# Altium PCB LM386AMPLIFIER.PcbDoc
Units mm, origin at the board's own origin, x right, y up, seen from the top; angles counter-clockwise.
Board outline 38 x 34 mm, 2 copper layers (Top Layer, Bottom Layer); 20 components, 13 nets, 45 pads, 0 vias.
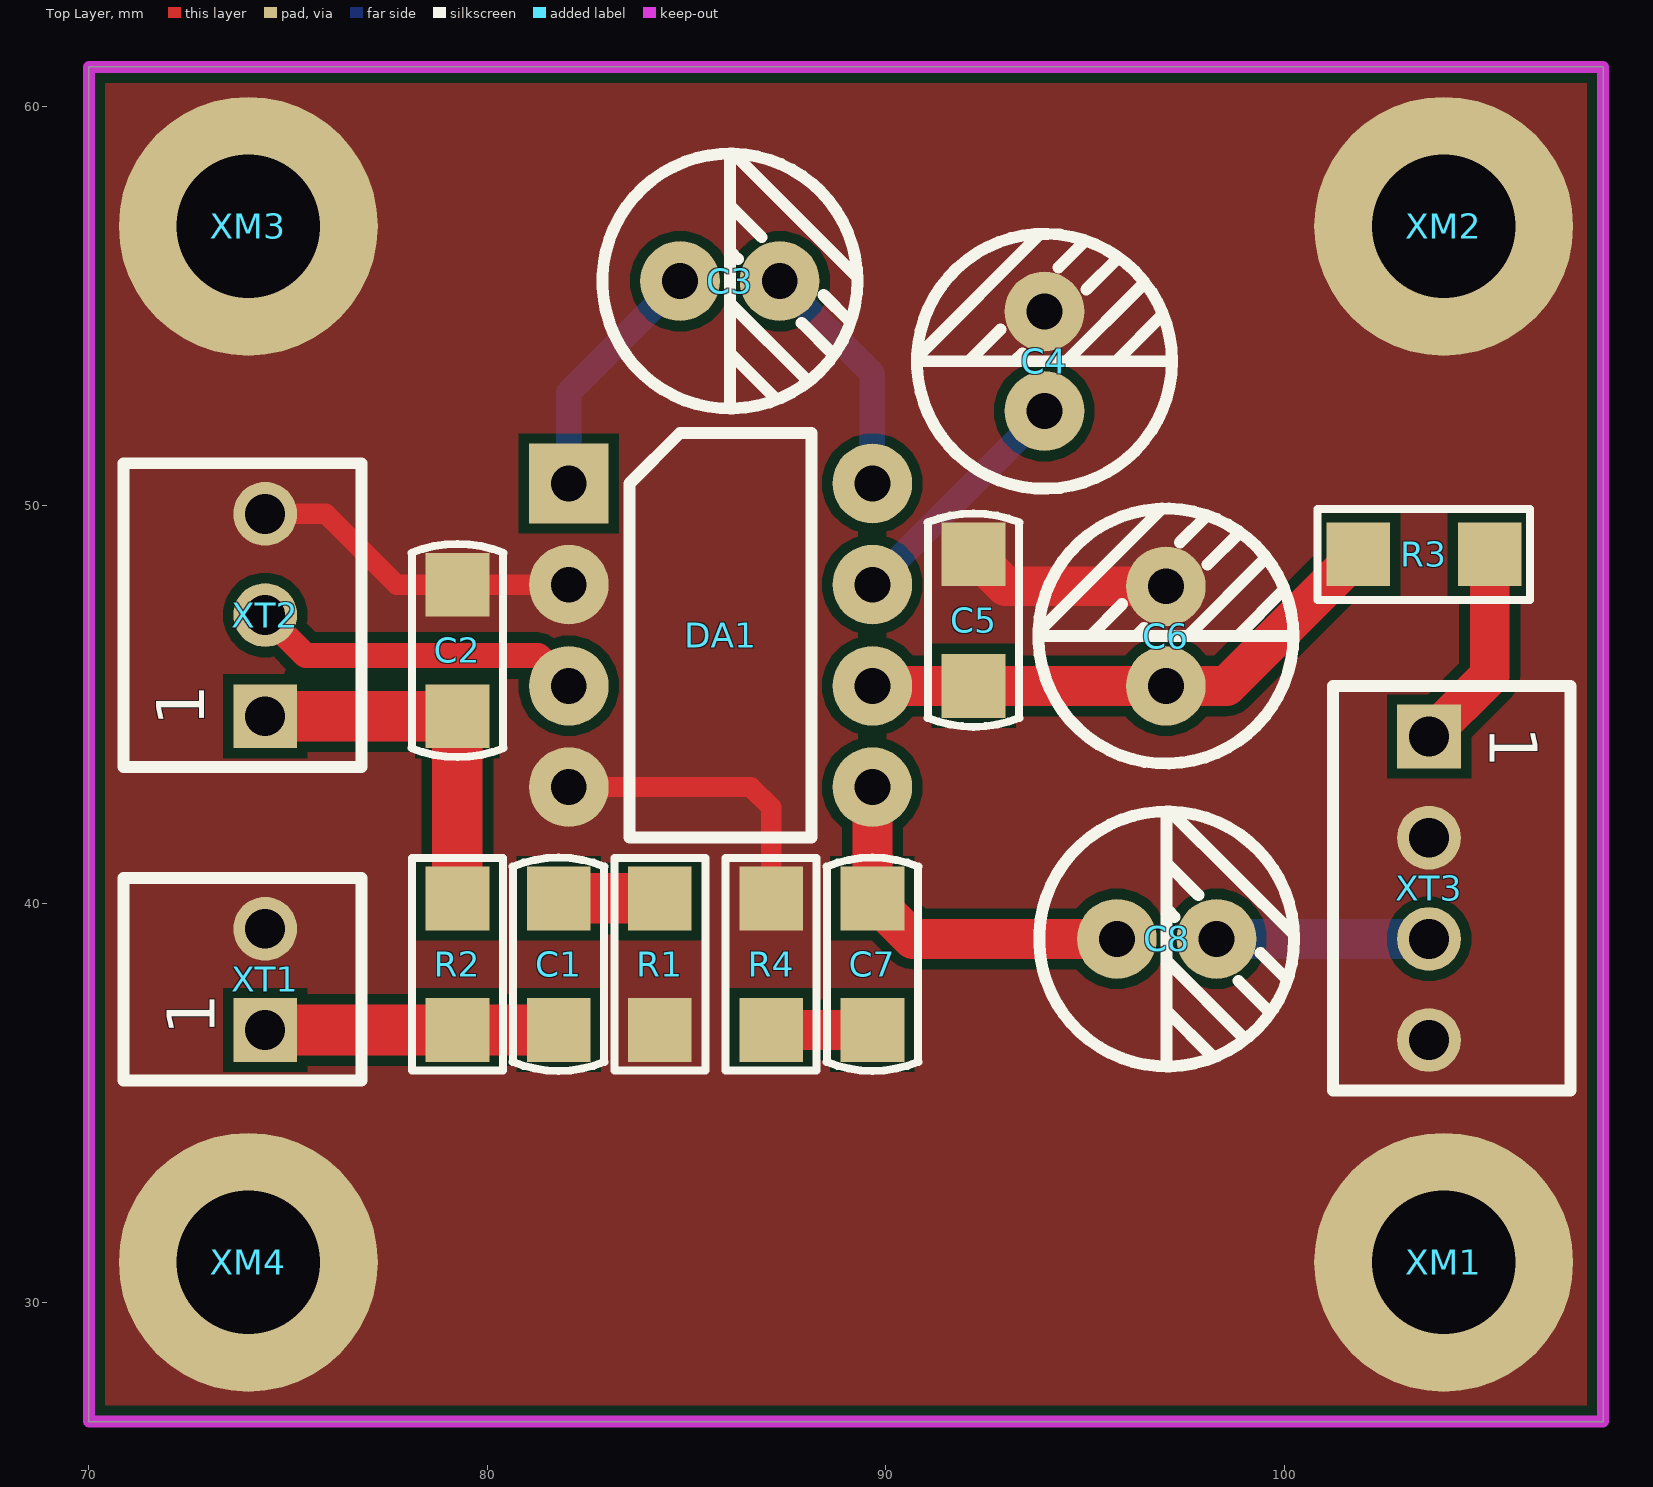
[diagram p0: Top Layer view]
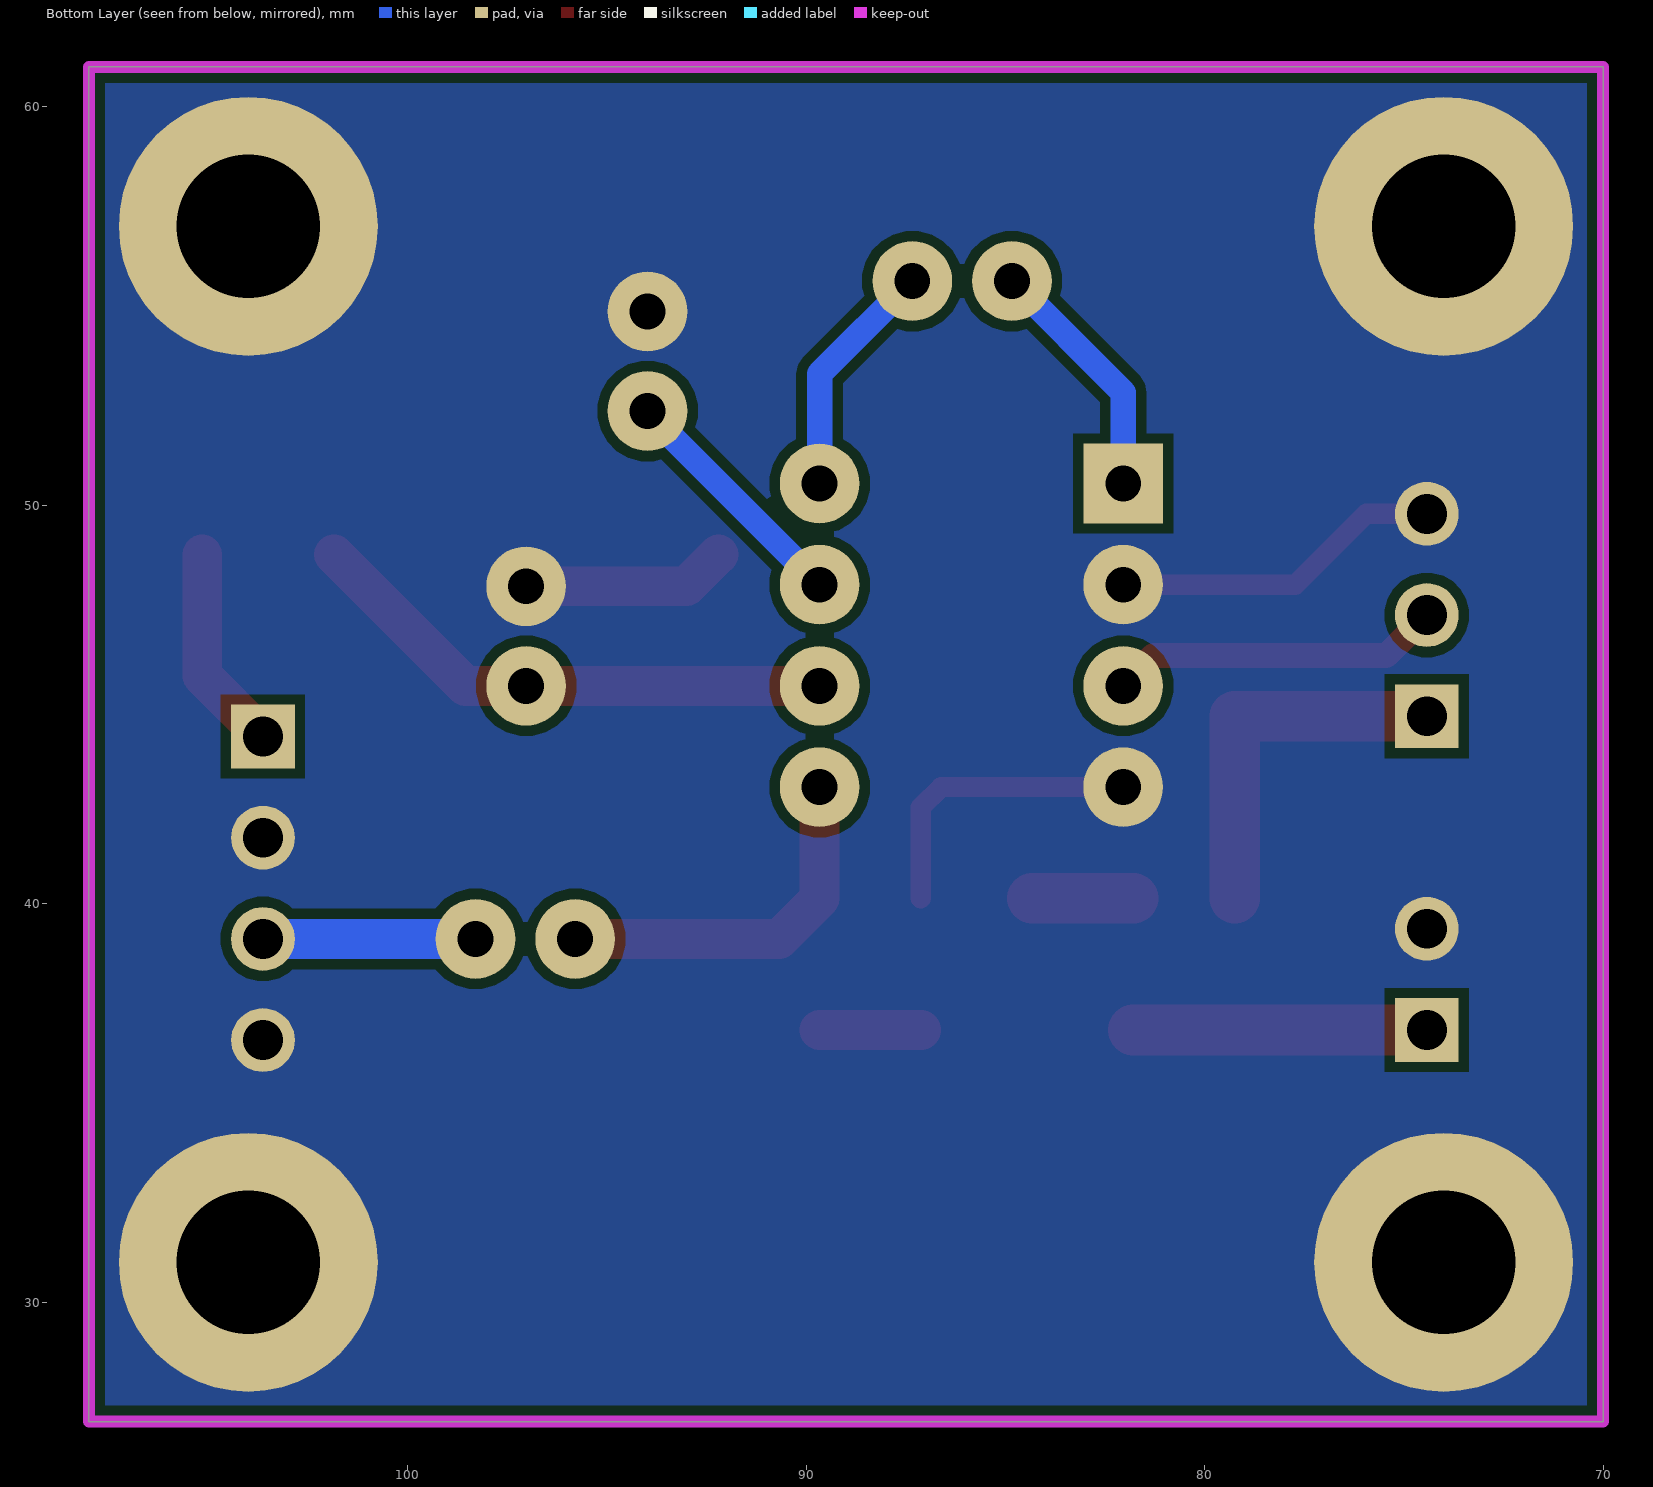
[diagram p1: Bottom Layer view, seen from below]
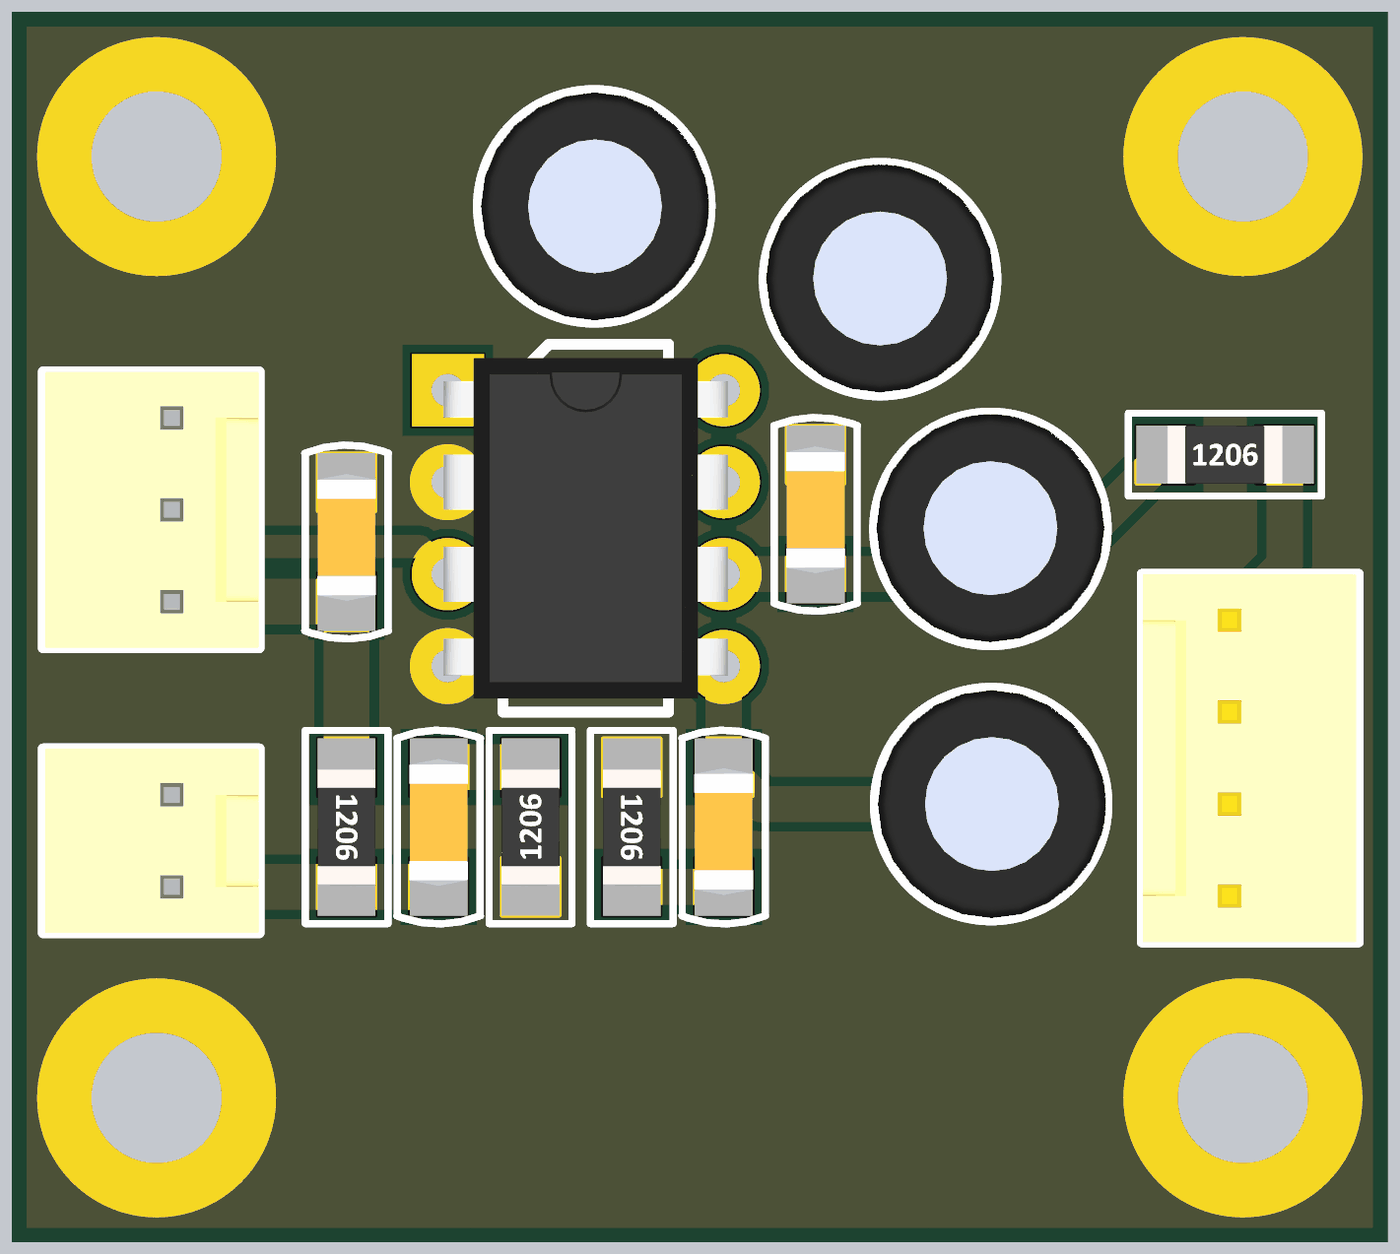
[diagram p2: 3D render of the assembled board from above, using the file's embedded part models]

## Layer stack, top to bottom
Top Solder: solder mask 0.0102, Solder Resist, Dk 3.5
Top Layer: signal copper 0.0356
Dielectric 1: dielectric 0.32, FR-4, Dk 4.8
Bottom Layer: signal copper 0.0356
Bottom Solder: solder mask 0.0102, Solder Resist, Dk 3.5

## Board outline
70,27 108,27 108,61 70,61

## Design rules (kind name [scope] priority, off if disabled: settings)
Clearance [All] p1: gap=0.254 ignorepadtopadclearanceinfootprint=FALSE except(0: Arc-Hole Track-Hole SMDPad-Hole THPad-Hole Via-Hole Fill-Hole Poly-Hole Region-Hole Text-Hole)
HoleSize [All] p1: absolutevalues=TRUE maxlimit=4 minlimit=0.3 maxpercent=80.000 minpercent=20.000
MinimumSolderMaskSliver [All] p1: minsoldermaskwidth=0.05
PlaneConnect [All] p1: planeconnectstyle=Direct reliefexpansion=0.508 reliefentries=4 reliefconductorwidth=0.254 reliefairgap=0.254
PolygonConnect [All] p1: connectstyle=Direct reliefconductorwidth=0.254 reliefentries=4 polygonreliefangle="90 Angle" airgapwidth=0.254
RoomDefinition LM386AMPLIFIER [InComponentClass('LM386AMPLIFIER')] p1: confinementstyle=ConfineIn formatcopy=TRUE lockcomponents=FALSE outline 70,27 108,27 108,61 70,61
RoutingVias [All] p1: holewidth=0.711 width=1.27 viastyle="Through Hole" minholewidth=0.711 minwidth=1.27 maxholewidth=0.711 maxwidth=1.27
SilkToSilkClearance [All] p1: silktosilkclearance=0
SilkToSolderMaskClearance [IsPad] p1: minsilkscreentomaskgap=0.05 clearancetoexposedcopper=TRUE
SolderMaskExpansion [All] p1: expansion=0.05 istentingtop=FALSE
Width [All] p1: maxlimit=1.27 minlimit=0.254 preferedwidth=0.254
25 further rules are at their usual default settings.

## Components (designator, comment, footprint, x,y, rotation, side; value= is the part's Value field where it differs from the comment)
C1 "10nF" C1206M 81.788,36.83 r90 top
C2 "47nF" C1206M 79.248,44.704 r90 top
C3 "10uF 16V" D6.3_P2.5 84.836,55.626 r90 top
C4 "10uF 16V" D6.3_P2.5 93.98,52.364 r180 top
C5 "100nF" C1206M 92.202,45.466 r90 top
C6 "220uF 16V" D6.3_P2.5 97.028,45.466 r180 top
C7 "10nF" C1206M 89.662,40.132 r270 top
C8 "220uF 16V" D6.3_P2.5 95.798,39.116 r90 top
DA1 "LM386N-1" DIP8 82.042,50.546 r0 top
R1 "51R" R1206M 84.328,36.83 r90 top
R2 "1k2" R1206M 79.248,40.132 r270 top
R3 "22R" R1206M 101.854,48.768 r0 top
R4 "51R" R1206M 87.122,40.132 r270 top
XM1 "" XM_D6.5mm_d3.6mm 104,31 r0 top
XM2 "" XM_D6.5mm_d3.6mm 104,57 r0 top
XM3 "" XM_D6.5mm_d3.6mm 74,57 r0 top
XM4 "" XM_D6.5mm_d3.6mm 74,31 r0 top
XT1 "X2" WF2 74.422,38.1 r90 top
XT2 "X3" WF3 74.422,47.244 r90 top
XT3 "X4" WF4 103.632,40.386 r270 top

## Footprints (in the part's own frame and the unit in brackets; to place one, negate y for a bottom-side part, rotate by r counter-clockwise, add the part's x,y. Pads: shape width x height; smd on the part's side, far side on the other; paste and mask are expansions set on the pad)
C1206M [mm]
  rect 1.6x1.6 smd: 1(0,0) 2(3.302,0)
  silkscreen extent -1.03,-1.16 4.33,1.16, body extent 0.03,-0.81 3.53,0.81, height 1.61
D6.3_P2.5 [mm]
  round 2 hole 0.9: 1(0,0) 2(0,-2.5)
  silkscreen extent -3.2,-4.45 3.2,1.95, body extent -3.15,-4.42 3.15,1.88, height 11
DIP8 [mm]
  rect 2x2 hole 0.9: 1(0,0)
  round 2 hole 0.9: 2(0,-2.54) 3(0,-5.08) 4(0,-7.62) 5(7.62,-7.62) 6(7.62,-5.08) 7(7.62,-2.54) 8(7.62,0)
  silkscreen extent 1.52,-8.89 6.1,1.27, body extent -0.13,-8.51 7.75,0.89, height 4.36
R1206M [mm]
  rect 1.6x1.6 smd: 1(0,0) 2(3.302,0)
  silkscreen extent -1.02,-1.14 4.32,1.14, body extent 0.05,-0.8 3.25,0.8, height 0.47
WF2 [mm]
  rect 1.6x1.6 hole 1: 1(-1.27,0)
  round 1.6 hole 1: 2(1.27,0)
  silkscreen extent -2.54,-2.41 2.54,3.56, body extent -2.54,-2.4 2.54,3.5, height 11.4
WF3 [mm]
  rect 1.6x1.6 hole 1: 1(-2.54,0)
  round 1.6 hole 1: 2(0,0) 3(2.54,0)
  silkscreen extent -3.81,-2.41 3.81,3.56, body extent -3.81,-2.4 3.81,3.5, height 11.4
WF4 [mm]
  rect 1.6x1.6 hole 1: 1(-3.81,0)
  round 1.6 hole 1: 2(-1.27,0) 3(1.27,0) 4(3.81,0)
  silkscreen extent -5.08,-2.41 5.08,3.56, body extent -5.08,-2.4 5.08,3.5, height 11.4
XM_D6.5mm_d3.6mm [mm]
  round 6.5 hole 3.6: 1(0,0)

## Part data
C1 C2 C5 C7: library part CAP
C3 C4 C6 C8: library part CAP_EL
DA1: "TEXAS INSTRUMENTS - LM386N-1 - AUDIO POWER AMPLIFIER, CLASS AB, 325mW DIP-8", Manufacturer_Name="Texas Instruments", Mouser Part Number=926-LM386N-1, Datasheet Link=https://www.ti.com/lit/ds/symlink/lm386.pdf?ts=1618981830930&ref_url=https%253A%252F%252Fwww.ti.com%252Fstore%252Fti%252Fen%252Fp%252Fproduct%252F%253Fp%253DLM386N-1%252FNOPB%2526keyMatch%253DLM386N-1%2526tisearch%253Dsearch-everything, Geometry.Height=5.08mm, Manufacturer_Part_Number=LM386N-1, Mouser Price/Stock=https://www.mouser.co.uk/ProductDetail/Texas-Instruments/LM386N-1?qs=QbsRYf82W3Gpu7TCrwcmkA%3D%3D
R1 R2 R3 R4: library part RES
XM1 XM2 XM3 XM4: library part XM

## Nets (pads, with @x,y where several pads share a name; then routed paths per layer and width w, separated by ;. In a path a pad name is that pad's centre, name@x,y a point inside that pad or via, vN(x,y) a via of type N, cw(c..) or ccw(c..) an arc to the next point about the centre after c; other vN are vias at no path point)
GND: C2.2 C4.2 C5.2 C6.2 DA1.2 DA1.4 R1.1 R4.1 XM1.1 XM2.1 XM3.1 XM4.1 XT1.2 XT2.3 XT3.2 XT3.4 | length 21.1
  Top Layer w0.508: XT2.3 75.946,49.784 77.724,48.006 C2.2 DA1.2 ; DA1.4 86.614,42.926 87.122,42.418 R4.1
  Top Layer w1: C5.2 93.004,47.966 C6.2
NetC1_1: C1.1 R2.2 XT1.1 | length 7.4
  Top Layer w1.27: XT1.1 R2.2 C1.1
NetC1_2: C1.2 R1.2 | length 2.5
  Top Layer w1.27: C1.2 R1.2
NetC2_1: C2.1 R2.1 XT2.1 | length 9.4
  Top Layer w1.27: XT2.1 C2.1 R2.1
NetC3_1: C3.1 DA1.1 | length 6.2
  Bottom Layer w0.635: DA1.1 82.042,52.832 C3.1
NetC3_2: C3.2 DA1.8 | length 6
  Bottom Layer w0.635: C3.2 89.662,53.3 DA1.8
NetC4_1: C4.1 DA1.7 | length 6.1
  Bottom Layer w0.635: DA1.7 93.98,52.324 C4.1
NetC5_1: C5.1 C6.1 DA1.6 R3.1 | length 13.6
  Top Layer w1: DA1.6 C5.1 C6.1 98.552,45.466 R3.1
NetC7_1: C7.1 C8.1 DA1.5 | length 9.4
  Top Layer w1: DA1.5 C7.1 90.678,39.116 C8.1
NetC7_2: C7.2 R4.2 | length 2.5
  Top Layer w1: R4.2 C7.2
NetC8_2: C8.2 XT3.3 | length 5.3
  Bottom Layer w1: C8.2 XT3.3
NetDA1_3: DA1.3 XT2.2 | length 8.4
  Top Layer w0.635: XT2.2 75.438,46.228 81.28,46.228 DA1.3
NetR3_2: R3.2 XT3.1 | length 5.2
  Top Layer w1: XT3.1 105.156,45.72 R3.2

## Polygon pours and split planes (outlines as drawn)
GND on Top Layer "NONET_L-01_P-001" (solid, pour order 1): 70,61 108,61 108,27 70,27
GND on Bottom Layer "NONET_L-01_P-001" (solid, pour order 0): 70,61 108,61 108,27 70,27

## Keep-outs
Keep-Out Layer:
  the board outline again, w0.3

## Text inside footprints (layer, text, board x,y; h text height)
XT1: Top Overlay "1" at 73.152,36.703 h1.2 r90
XT2: Top Overlay "1" at 72.898,44.45 h1.2 r90
XT3: Top Overlay "1" at 105.156,44.45 h1.2 r270